# EAGLE board Nusbio 2-FT4222 (EAGLE 7.6.0)

Size 33 x 47 mm. Coordinates in mm from the lower left corner, seen from the top.
Outline: 0,0 33,0 33,47 0,47 0,0
Copper layers (1*16): Top 0.035mm / dielectric 1.5mm / Bottom 0.035mm
Design rules "default": minimum track width 10mil, minimum drill 24mil, track to track 8mil, track to pad 8mil, pad to pad 8mil, via to via 8mil, smd to smd 8mil, copper to edge 40mil, drill to drill 8mil, minimum pad ring 10mil, minimum via ring 8mil, stop-mask expansion 4mil, vias tented up to drill 0mil, thermal gap 10mil
Holes 3.2 mm at 2.5,33 30.5,33 2.5,5 30.5,5

## Footprints (pad centres in the part's own frame; a part is rotated, then mirrored left to right if it is on the bottom)
C1206 = smd 1.6 x 1.8: 1 -1.4,0; 2 1.4,0
1X12 = drill 1.016 long: 1 -13.97,0; 2 -11.43,0; 3 -8.89,0; 4 -6.35,0; 5 -3.81,0; 6 -1.27,0; 7 1.27,0; 8 3.81,0; 9 6.35,0; 10 8.89,0; 11 11.43,0; 12 13.97,0
SO-08M = smd 0.6 x 2.2: 1 -1.905,-3.33; 2 -0.635,-3.33; 3 0.635,-3.33; 4 1.905,-3.33; 5 1.905,3.33; 6 0.635,3.33; 7 -0.635,3.33; 8 -1.905,3.33
1X03 = drill 1.016 long: 1 -2.54,0; 2 0,0; 3 2.54,0
R1206 = smd 1.6 x 1.803: 1 -1.422,0; 2 1.422,0
1X10-BIG = drill 1.016 pad 1.778 octagon: 1 -11.43,0; 2 -8.89,0; 3 -6.35,0; 4 -3.81,0; 5 -1.27,0; 6 1.27,0; 7 3.81,0; 8 6.35,0; 9 8.89,0; 10 11.43,0

## Placement (x,y rotation side)
CAP_EEPROM_10MF  [C1206]  22,9.5 90 bottom
FT4222_LEFT  [1X12]  6.5,16 270 top
FT4222_RIGHT  [1X12]  26.5,16 270 top
IC1  24LC64SM  [SO-08M]  15.5,9.5 90 bottom
JPX  [1X03]  30.6,13.5 90 top
R_1K_I2C_SCL  [R1206]  14,3 0 bottom
R_1K_I2C_SDA  [R1206]  21,3 0 bottom
SPI_1_2  PINHD-1X10  [1X10-BIG]  16,45.5 180 top

## Library data of the parts
CAP_EEPROM_10MF FT4222_LEFT FT4222_RIGHT R_1K_I2C_SCL R_1K_I2C_SDA SPI_1_2 = adafruit
IC1 = microchip; MF: MICROCHIP; MPN: 24LC64T-I/SN; OC_FARNELL: 9758070; OC_NEWARK: 12C2021
JPX = pinhead

## Nets
GND: CAP_EEPROM_10MF.2 FT4222_LEFT.1 IC1.1 IC1.2 IC1.3 IC1.4 IC1.7 SPI_1_2.10
I2C_SCL: FT4222_RIGHT.9 IC1.6 R_1K_I2C_SCL.1 SPI_1_2.7
I2C_SDA: FT4222_RIGHT.8 IC1.5 R_1K_I2C_SDA.1 SPI_1_2.8
I_CS_SS0O: FT4222_RIGHT.4 SPI_1_2.4
I_GPIO2_SS3O: FT4222_RIGHT.7 SPI_1_2.5
I_GPIO3: FT4222_RIGHT.6 SPI_1_2.6
IO2: FT4222_LEFT.8 JPX.3
IO3: FT4222_LEFT.9 JPX.2
SPI_CLK: FT4222_LEFT.4 SPI_1_2.1
SPI_MISO: FT4222_LEFT.5 SPI_1_2.3
SPI_MOSI: FT4222_LEFT.6 SPI_1_2.2
VCC_3V: CAP_EEPROM_10MF.1 FT4222_LEFT.11 IC1.8 R_1K_I2C_SCL.2 R_1K_I2C_SDA.2 SPI_1_2.9
VCC_5V: FT4222_RIGHT.12 JPX.1

## Tracks (layer width: path | path; a pad name or v marks a point on that pad's centre or on a via)
GND  (7 unrouted)
I2C_SCL  (3 unrouted)
I2C_SDA  (3 unrouted)
I_CS_SS0O  (1 unrouted)
I_GPIO2_SS3O  (1 unrouted)
I_GPIO3  (1 unrouted)
IO2  (1 unrouted)
IO3  (1 unrouted)
SPI_CLK  (1 unrouted)
SPI_MISO  (1 unrouted)
SPI_MOSI  (1 unrouted)
VCC_3V  (5 unrouted)
VCC_5V  (1 unrouted)

## Text on the board
tNames: GND | VCC 3V | I2C SDA | I2C SCL | GPIO 3 | GPIO 2 CS3 | CS0 | SPI MISO | SPI MOSI | SPI CLCK | IO2 | IO3 | NUSBIO 2 SPI/I2C | 5V
bNames: NUSBIO 2 SPI/I2C | MadeInTheUSB.net | PCBv2 2017.4 /FT